# Altium PCB FIT_PM_Dual_Range_AFE.PcbDoc (part 17 of 17)
Units mm, origin at the board's own origin, x right, y up, seen from the top; angles counter-clockwise.
Board outline 259 x 114 mm, 8 copper layers (Top Layer, Mid-Layer 1, Mid-Layer 2, Layer 1, Layer 2, Mid-Layer 3, Mid-Layer 4, Bottom Layer), stack 1.616 mm thick; 963 components, 806 nets, 4757 pads, 2208 vias.
Unrouted connection lines stored in the file: 682.
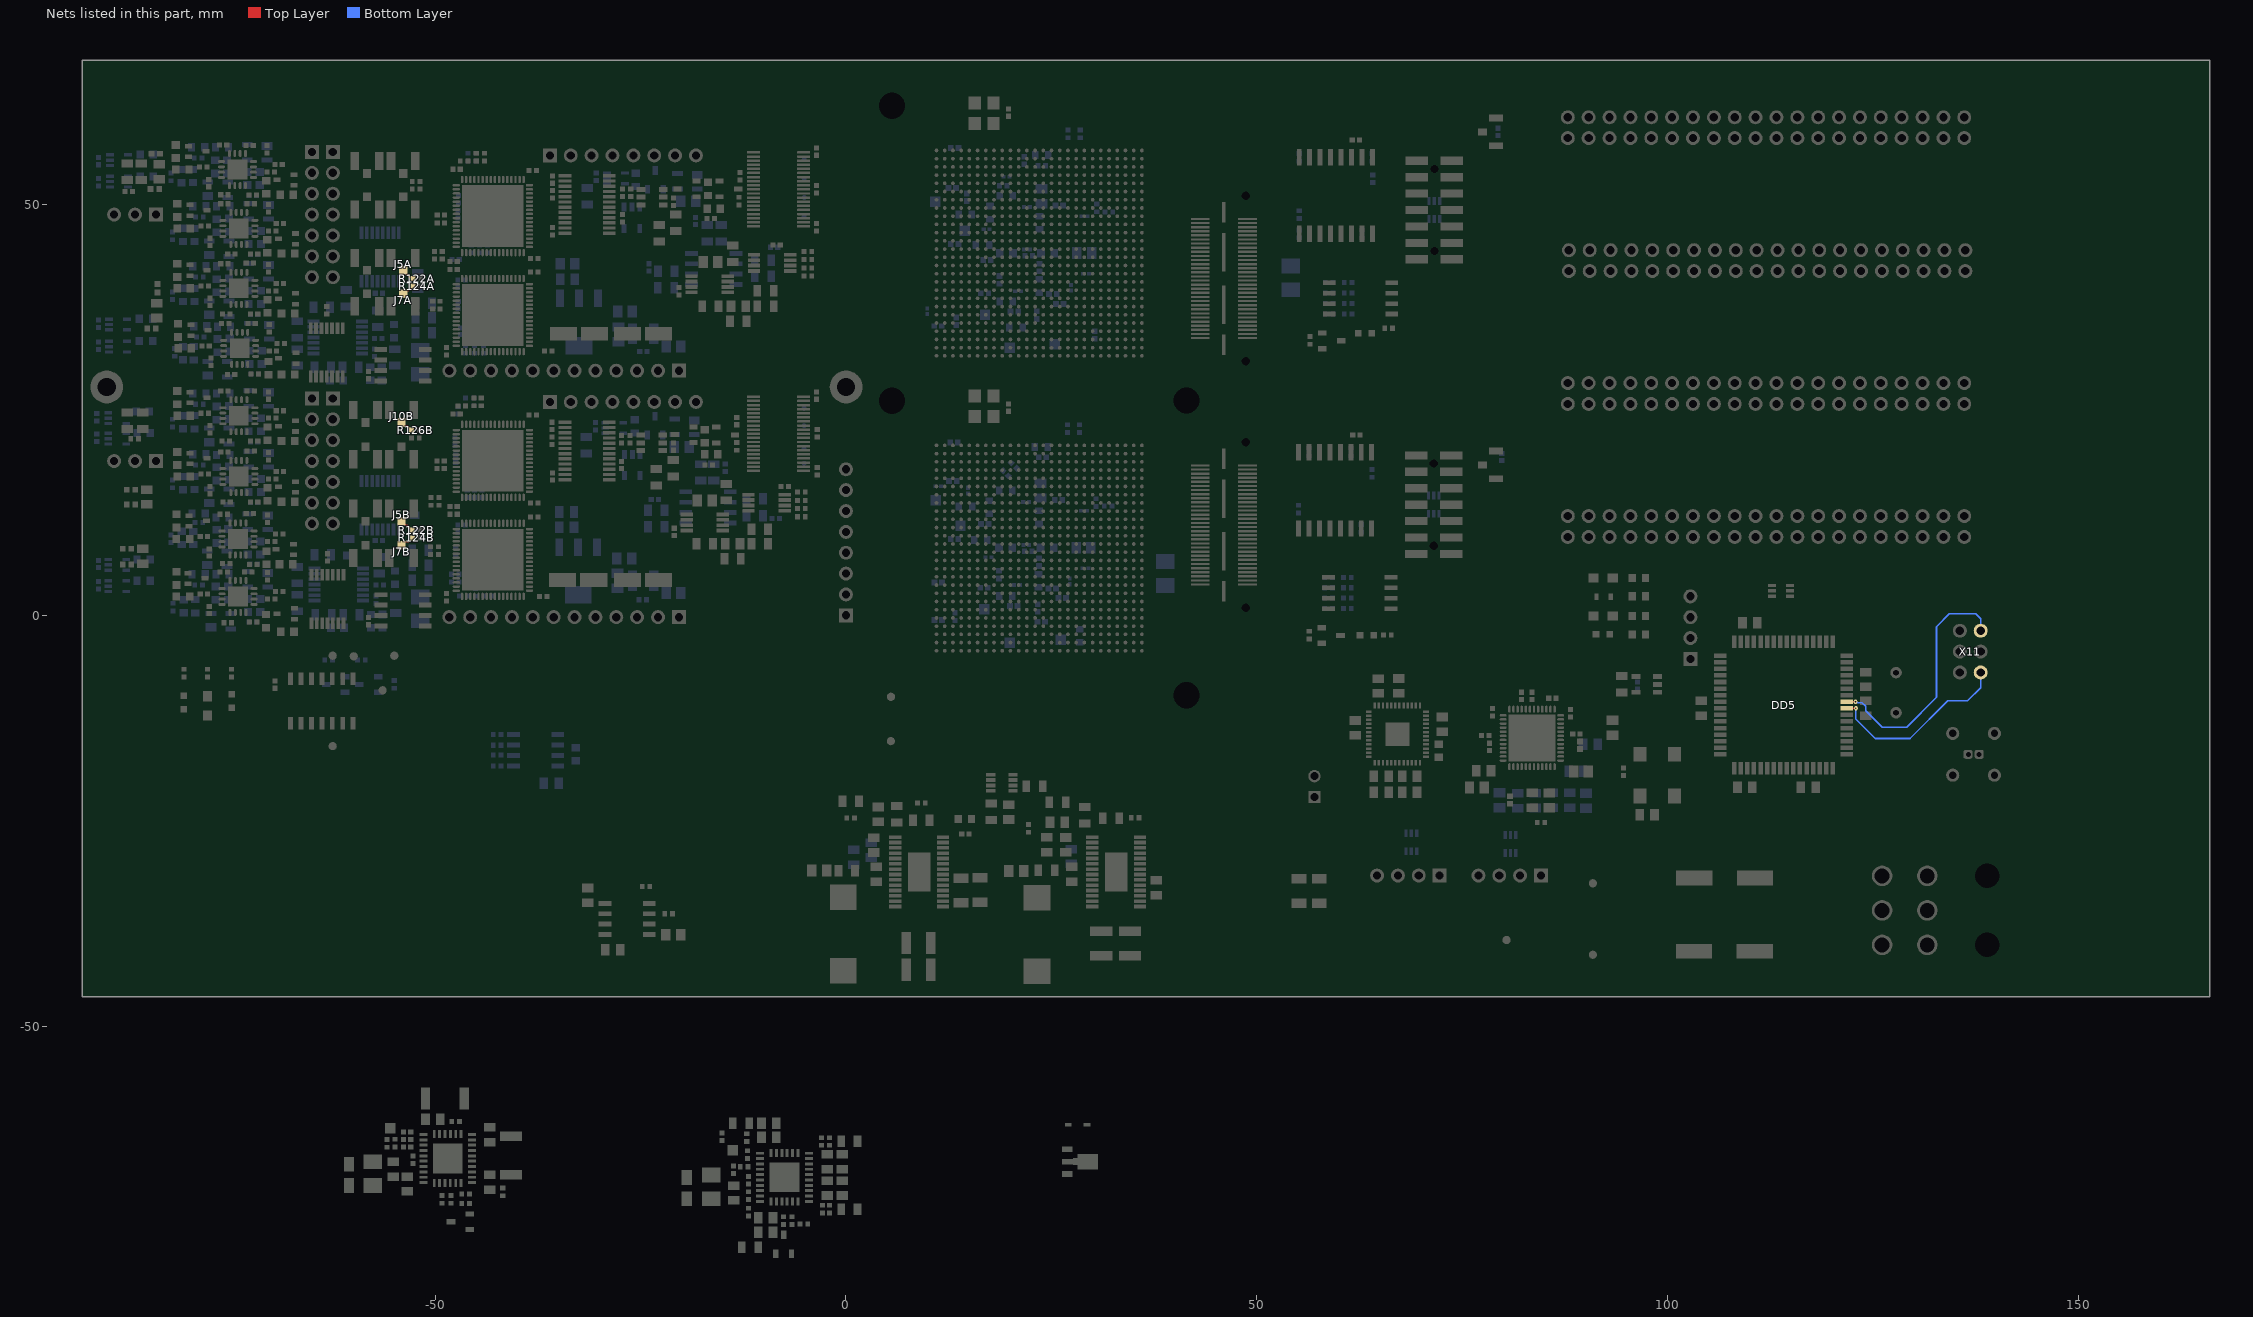
[diagram p19: the nets of this part, all layers, seen from the top]

## Via types
v1: diameter 0.5, hole 0.2, Top Layer to Bottom Layer, tented both sides, 1234 vias
v2: diameter 0.4, hole 0.2, Top Layer to Bottom Layer, tented both sides, 876 vias
v3: diameter 1, hole 0.6, Top Layer to Bottom Layer, tented both sides, 74 vias
v4: diameter 0.8, hole 0.4, Top Layer to Bottom Layer, tented both sides, 15 vias
v5: diameter 0.5, hole 0.2, Top Layer to Bottom Layer, 9 vias

## Nets (pads, with @x,y where several pads share a name; then routed paths per layer and width w, separated by ;. In a path a pad name is that pad's centre, name@x,y a point inside that pad or via, vN(x,y) a via of type N, cw(c..) or ccw(c..) an arc to the next point about the centre after c; other vN are vias at no path point) (continued)
XINBAB_P: J10B.1 R126B.1 | length 1.6
  Top Layer w0.145: J10B.1@-54.1,23.475 -53.735,23.11 -53.467,23.11 -53.126,22.769 -53.106,22.769 -52.889,22.551 R126B.1@-52.889,22.531
XINBBA_N: J7A.1 R124A.1 | length 1.6
  Top Layer w0.145: J7A.1@-53.9,39.146 -53.555,39.491 -53.267,39.491 -52.932,39.826 -52.912,39.826 -52.695,40.043 R124A.1@-52.695,40.063
XINBBA_P: J5A.1 R122A.1 | length 1.6
  Top Layer w0.1: J5A.1@-53.9,41.989 -53.9,41.964 -53.45,41.514 -53.425,41.514 -53.081,41.17 -52.87,41.17 R122A.1@-52.7,41
XINBBB_N: J7B.1 R124B.1 | length 1.7
  Top Layer w0.145: J7B.1@-54.1,8.525 -54.1,8.55 -53.673,8.977 -53.224,8.977 -53.016,9.186 -52.996,9.186 -52.778,9.403 R124B.1@-52.778,9.423
XINBBB_P: J5B.1 R122B.1 | length 1.8
  Top Layer w0.145: J5B.1@-54.1,11.475 -54.1,11.45 -53.673,11.023 -53.446,11.023 -53.021,10.597 -53.001,10.597 -52.784,10.38 R122B.1@-52.784,10.36
Xmega_PDI_CLOCK: DD5.57 X11.5 | length 30.4
  Top Layer w0.2: DD5.57@121.819,-10.514 v1(122.881,-10.514)
  Bottom Layer w0.2: v1(122.881,-10.514) 122.962,-10.514 123.082,-10.635 123.68,-10.635 124.119,-11.074 124.119,-11.614 126.119,-13.614 129.111,-13.614 132.747,-9.978 132.747,-1.374 134.307,0.186 137.534,0.186 138.119,-0.399 X11.5@138.119,-1.874
Xmega_PDI_DATA: DD5.56 X11.1 | length 23
  Top Layer w0.2: DD5.56@121.819,-11.314 v1(122.919,-11.314)
  Bottom Layer w0.2: v1(122.919,-11.314) 122.919,-12.614 125.298,-14.993 129.516,-14.993 134.095,-10.414 136.519,-10.414 138.119,-8.814 X11.1@138.119,-6.954
pads on no net: D1A.6 D1B.6 D2.2 D3.2 D4A.4 D4A.5 D4A.6 D4B.4 D4B.5 D4B.6 D5.4 D5.5 D5.6 DA2A.1 DA2A.2 DA2B.1 DA2B.2 DA6A.3 DA6A.11 DA6B.3 DA6B.11 DA6C.3 DA6C.11 DA6D.3 DA6D.11 DA15A.3 DA15A.11 DA15B.3 DA15B.11 DA15C.3 DA15C.11 DA15D.3 DA15D.11 DA17A.1 DA17A.5 DA17A.7 DA17A.8 DA17B.1 DA17B.5 DA17B.7 DA17B.8 DA27.5 DD3.6 DD3.7 DD3.12 DD3.13 DD3.19 DD3.20 DD3.31 DD3.33 DD3.45 DD3.46 DD5.6 DD5.7 DD5.8 DD5.9 DD5.10 DD5.11 DD5.12 DD5.13 DD5.17 DD5.18 DD5.20 DD5.26 DD5.27 DD5.28 DD5.29 DD5.30 DD5.31 DD5.32 DD5.33 DD5.36 DD5.37 DD5.40 DD5.41 DD5.42 DD5.43 DD5.46 DD5.47 DD5.48 DD5.49 DD5.55 DD10.7 DD19.1 DD19.5 DD19.6 DD19.19 DD19.20 DD19.21 DD19.22 DD19.25 DD19.26 DD19.27 DD19.28 DD19.31 DD19.32 DD19.33 DD19.34 DD19.35 DD19.36 DD19.39 DD19.40 DD19.41 DD19.42 DD19.45 DD19.46 DD19.47 DD19.48 DD21A.19 DD21B.19 DD31.1 HS1A.1 HS1B.1 IC4.11 IC4.12 IC5A.4 IC5B.4 IC6A.38 IC6A.39 IC6A.58 IC6A.59 IC6B.38 IC6B.39 IC6B.58 IC6B.59 IC7A.38 IC7A.39 IC7A.58 IC7A.59 IC7B.38 IC7B.39 IC7B.58 IC7B.59 IC8A.A3 IC8A.A4 IC8A.A14 IC8A.A15 IC8A.A17 IC8A.A18 IC8A.A19 IC8A.A20 IC8A.A22 IC8A.A23 IC8A.A24 IC8A.A25 IC8A.AA4 IC8A.AA5 IC8A.AA13 IC8A.AA18 IC8A.AA23 IC8A.AB17 IC8A.AB25 IC8A.AB26 IC8A.AC4 IC8A.AC5 IC8A.AC16 IC8A.AC26 IC8A.AD6 IC8A.AD7 IC8A.AD19 IC8A.AD26 IC8A.AE8 IC8A.AE9 IC8A.AE18 IC8A.AE25 IC8A.AE26 IC8A.AF6 IC8A.AF7 IC8A.B1 IC8A.B2 IC8A.B6 IC8A.B7 IC8A.B12 IC8A.B14 IC8A.B15 IC8A.B16 IC8A.B17 IC8A.B19 IC8A.B20 IC8A.B21 IC8A.B22 IC8A.B24 IC8A.B25 IC8A.B26 IC8A.C3 IC8A.C4 IC8A.C12 IC8A.C16 IC8A.C17 IC8A.C18 IC8A.C19 IC8A.C20 IC8A.C21 IC8A.C22 IC8A.C23 IC8A.C24 IC8A.C26 IC8A.D1 IC8A.D2 IC8A.D6 IC8A.D7 IC8A.D15 IC8A.D16 IC8A.D17 IC8A.D18 IC8A.D19 IC8A.D20 IC8A.D21 IC8A.D23 IC8A.D24 IC8A.D25 IC8A.D26 IC8A.E4 IC8A.E5 IC8A.E12 IC8A.E13 IC8A.E15 IC8A.E16 IC8A.E17 IC8A.E18 IC8A.E20 IC8A.E21 IC8A.E22 IC8A.E23 IC8A.E25 IC8A.F6 IC8A.F7 IC8A.F13 IC8A.F15 IC8A.F17 IC8A.F18 IC8A.F19 IC8A.F20 IC8A.F22 IC8A.F23 IC8A.G4 IC8A.G5 IC8A.G15 IC8A.G16 IC8A.G17 IC8A.G18 IC8A.G19 IC8A.G20 IC8A.G21 IC8A.G22 IC8A.H6 IC8A.H7 IC8A.H11 IC8A.H12 IC8A.H13 IC8A.H16 IC8A.H17 IC8A.H18 IC8A.H19 IC8A.J4 IC8A.J5 IC8A.J10 IC8A.J11 IC8A.J12 IC8A.J13 IC8A.J16 IC8A.J19 IC8A.J20 IC8A.K6 IC8A.K7 IC8A.K10 IC8A.K18 IC8A.L4 IC8A.L5 IC8A.L18 IC8A.M6 IC8A.M7 IC8A.M20 IC8A.M21 IC8A.M22 IC8A.M24 IC8A.N4 IC8A.N5 IC8A.N19 IC8A.N21 IC8A.N22 IC8A.N23 IC8A.N24 IC8A.N26 IC8A.P19 IC8A.P20 IC8A.P21 IC8A.P23 IC8A.P24 IC8A.R4 IC8A.R5 IC8A.R20 IC8A.R21 IC8A.R22 IC8A.R23 IC8A.R25 IC8A.T6 IC8A.T7 IC8A.T19 IC8A.T20 IC8A.T22 IC8A.T23 IC8A.T24 IC8A.T25 IC8A.U4 IC8A.U5 IC8A.U19 IC8A.U20 IC8A.U21 IC8A.U22 IC8A.U24 IC8A.V19 IC8A.V21 IC8A.V22 IC8A.V23 IC8A.V24 IC8A.W4 IC8A.W5 IC8A.W12 IC8A.W13 IC8A.W14 IC8A.W15 IC8A.W19 IC8A.W20 IC8A.W21 IC8A.W23 IC8A.W24 IC8A.Y6 IC8A.Y7 IC8A.Y13 IC8A.Y16 IC8A.Y17 IC8A.Y18 IC8A.Y22 IC8A.Y23 IC8B.A3 IC8B.A4 IC8B.A14 IC8B.A15 IC8B.A17 IC8B.A18 IC8B.A19 IC8B.A20 IC8B.A22 IC8B.A23 IC8B.A24 IC8B.A25 IC8B.AA4 IC8B.AA5 IC8B.AA13 IC8B.AA18 IC8B.AA23 IC8B.AB17 IC8B.AB25 IC8B.AB26 IC8B.AC4 IC8B.AC5 IC8B.AC16 IC8B.AC26 IC8B.AD6 IC8B.AD7 IC8B.AD19 IC8B.AD26 IC8B.AE8 IC8B.AE9 IC8B.AE18 IC8B.AE25 IC8B.AE26 IC8B.AF6 IC8B.AF7 IC8B.B1 IC8B.B2 IC8B.B6 IC8B.B7 IC8B.B12 IC8B.B14 IC8B.B15 IC8B.B16 IC8B.B17 IC8B.B19 IC8B.B20 IC8B.B21 IC8B.B22 IC8B.B24 IC8B.B25 IC8B.B26 IC8B.C3 IC8B.C4 IC8B.C12 IC8B.C16 IC8B.C17 IC8B.C18 IC8B.C19 IC8B.C20 IC8B.C21 IC8B.C22 IC8B.C23 IC8B.C24 IC8B.C26 IC8B.D1 IC8B.D2 IC8B.D6 IC8B.D7 IC8B.D15 IC8B.D16 IC8B.D17 IC8B.D18 IC8B.D19 IC8B.D20 IC8B.D21 IC8B.D23 IC8B.D24 IC8B.D25 IC8B.D26 IC8B.E4 IC8B.E5 IC8B.E12 IC8B.E13 IC8B.E15 IC8B.E16 IC8B.E17 IC8B.E18 IC8B.E20 IC8B.E21 IC8B.E22 IC8B.E23 IC8B.E25 IC8B.F6 IC8B.F7 IC8B.F13 IC8B.F15 IC8B.F17 IC8B.F18 IC8B.F19 IC8B.F20 IC8B.F22 IC8B.F23 IC8B.G4 IC8B.G5 IC8B.G15 IC8B.G16 IC8B.G17 IC8B.G18 IC8B.G19 IC8B.G20 IC8B.G21 IC8B.G22 IC8B.H6 IC8B.H7 IC8B.H11 IC8B.H12 IC8B.H13 IC8B.H16 IC8B.H17 IC8B.H18 IC8B.H19 IC8B.J4 IC8B.J5 IC8B.J10 IC8B.J11 IC8B.J12 IC8B.J13 IC8B.J16 IC8B.J19 IC8B.J20 IC8B.K6 IC8B.K7 IC8B.K10 IC8B.K18 IC8B.L4 IC8B.L5 IC8B.L18 IC8B.M6 IC8B.M7 IC8B.M20 IC8B.M21 IC8B.M22 IC8B.M24 IC8B.N4 IC8B.N5 IC8B.N19 IC8B.N21 IC8B.N22 IC8B.N23 IC8B.N24 IC8B.N26 IC8B.P19 IC8B.P20 IC8B.P21 IC8B.P23 IC8B.P24 IC8B.R4 IC8B.R5 IC8B.R20 IC8B.R21 IC8B.R22 IC8B.R23 IC8B.R25 IC8B.T6 IC8B.T7 IC8B.T19 IC8B.T20 IC8B.T22 IC8B.T23 IC8B.T24 IC8B.T25 IC8B.U4 IC8B.U5 IC8B.U19 IC8B.U20 IC8B.U21 IC8B.U22 IC8B.U24 IC8B.V19 IC8B.V21 IC8B.V22 IC8B.V23 IC8B.V24 IC8B.W4 IC8B.W5 IC8B.W12 IC8B.W13 IC8B.W14 IC8B.W15 IC8B.W19 IC8B.W20 IC8B.W21 IC8B.W23 IC8B.W24 IC8B.Y6 IC8B.Y7 IC8B.Y13 IC8B.Y16 IC8B.Y17 IC8B.Y18 IC8B.Y22 IC8B.Y23 IC15A.4 IC15A.5 IC15A.6 IC15A.11 IC15A.12 IC15A.13 IC15A.14 IC15B.4 IC15B.5 IC15B.6 IC15B.11 IC15B.12 IC15B.13 IC15B.14 J1A.12 J1A.15 J1A.16 J1B.12 J1B.15 J1B.16 J8A.49 J8A.50 J8A.51 J8A.52 J8A.53 J8A.54 J8A.55 J8A.56 J8A.57 J8A.58 J8A.59 J8A.60 J8A.65 J8A.66 J8B.49 J8B.50 J8B.51 J8B.52 J8B.53 J8B.54 J8B.55 J8B.56 J8B.57 J8B.58 J8B.59 J8B.60 J8B.65 J8B.66 U1A.12 U1A.13 U1A.16 U1A.17 U1B.12 U1B.13 U1B.16 U1B.17 VD5A.2 VD5B.2 X5.1 X5.5 X5.39 X6.1 X6.5 X6.39 X9.1 X9.5 X9.39 X10.1 X10.5 X10.39 X11.3 X11.4 X15.MECH1 X15.MECH2 ZQ2.1
copper on no net: | length 13.9
  Top Layer w0.1: v1(24.5,38.1) 25.533,38.1 26.019,38.586
  Top Layer w0.145: 21.019,14.686 v2(21.333,14.371)
  Top Layer w0.2: 59.019,-27.844 v1(59.019,-27.167)
  Top Layer w0.3: -69.4,39.5 v1(-68.8,39.5) ; -68.45,40.4 v1(-67.8,40.4) ; v1(-67.8,22.429) -67.05,22.429 -67,22.379 -67,21.329 -67.1,21.229
  Mid-Layer 2 w0.1: -15.701,25.999 -15.694,25.992
  Bottom Layer w0.2: -14.446,-28.741 -10.251,-28.741 v3(-7.741,-26.231)
  other v1: -49.904,-41.991 -69.591,-37.791 -61.891,-35.191 -52.504,-34.091 -9.641,-31.441 -18.594,-30.688 -57.597,-20.624 -56.597,-20.624 -55.697,-20.624 -67.8,15.029 -82.2,26.968 -67.968,52.396
  other v3: -90.231,-17.814 -89.081,-17.814 -87.931,-17.814 -90.281,-16.414 -89.131,-16.414 -87.981,-16.414

## Polygon pours and split planes (outlines as drawn)
P1V8_QDCB on Layer 2 "NONET_L-01_P-001" (solid, remove dead copper, pour order 9098): -20.7,3.6 -22.7,1.6 -25.5,1.6 -26,1.1 -49.3,1.1 -49.8,1.6 -49.8,26.2 -49.4,26.6 -46.6,26.6 -45.4,25.4 -45.4,4.6 -44.8,4 -26.4,4 -24.1,6.3 -20.8,6.3 -20.7,6.2 -20.7,5.1
P1V8_QDCA on Layer 2 "NONET_L-01_P-001" (solid, remove dead copper, pour order 9097): -22.2,31.9 -23.3,30.8 -49.3,30.8 -49.7,31.2 -49.7,55.3 -49,56 -46.4,56 -45.7,55.3 -45.7,33.4 -45.3,33 -25.4,33 -24.3,34.1 -22.6,34.1 -22.2,33.7
P0V85 on Layer 2 "P0V85_L05_P9064" (solid, pour order 9064): 36.769,44.336 36.769,6.086 38.519,4.336 48.363,4.336 51.075,7.048 51.075,43.221 49.96,44.336 38.769,44.336
N5V5 on Layer 2 "N5V5_L05_P9053" (solid, pour order 9053): 20.703,-40.924 20.703,-22.224 39.303,-22.224 39.303,-40.924
P1V8 on Layer 2 "P1V8_L05_P9063" (solid, pour order 9063): 28.895,-11.176 34.134,-16.414 42.019,-16.414 50.019,-24.414 58.519,-24.414 59.519,-23.414 59.519,-2.914 54.35,2.255 28.832,2.255
VIN_P12V0 on Layer 2 "VIN_P12V0_L05_P9062" (solid, pour order 9062): 60.371,34.686 60.371,-44.514 113.519,-44.514 113.519,-27.414 85.019,-27.414 71.619,-14.014 71.619,34.686
P3V3_QDCA on Bottom Layer "NONET_L-01_P-001" (solid, remove dead copper, pour order 9096): -29.4,37.1 -28.9,37.6 -28.9,40.3 -29.4,40.8 -31.1,40.8 -31.6,40.3 -31.6,37.6 -31.1,37.1
P1V8_QDCA on Bottom Layer "NONET_L-01_P-001" (solid, remove dead copper, pour order 9093): -21.5,34.2 -23.8,34.2 -24.6,33.4 -24.6,31.8 -24.3,31.5 -21.5,31.5 -21.2,31.8 -21.2,33.9
NetC23_2 on Bottom Layer "NETC23_2_L08_P9086" (solid, remove dead copper, pour order 9086): -49.9,-71.5 -50.3,-71.9 -53.5,-71.9 -53.9,-71.5 -53.9,-70.6 -51.8,-68.5 -51.8,-58.2 -50.8,-57.2 -48.9,-57.2 -48.5,-57.6 -48.5,-59.5 -49.9,-60.9 -49.9,-68.1
P3V3_QDCB on Bottom Layer "P3V3_QDCB_L08_P9082" (solid, remove dead copper, pour order 9082): -31.6,9.2 -31.6,5 -31.3,4.7 -29.2,4.7 -28.9,5 -28.9,9.2 -29.2,9.5 -31.3,9.5
P1V8_QDCB on Bottom Layer "P1V8_QDCB_L08_P9079" (solid, remove dead copper, pour order 9079): -24.6,2.2 -24.6,5.8 -24.1,6.3 -21,6.3 -20.7,6 -20.7,4 -21.3,3.4 -21.3,2 -21.7,1.6 -24,1.6
P3V3_QDCA on Top Layer "NONET_L-01_P-001" (solid, remove dead copper, pour order 9095): -29,33.1 -28.8,33.3 -28.8,39.9 -29.4,40.5 -31.5,40.5 -32.3,39.7 -32.3,33.3 -32.1,33.1 -31.8,33.1
P1V8_QDCA on Top Layer "NONET_L-01_P-001" (solid, remove dead copper, pour order 9094): -21,35.1 -21.2,35.3 -24.4,35.3 -24.6,35.1 -24.6,31.8 -24.3,31.5 -21.5,31.5 -21,32
P12V0_IN on Top Layer "P12V0_IN_L01_P9092" (solid, remove dead copper, pour order 9092): -50.9,-67.3 -50.8,-67.2 -50.8,-66.3 -50.9,-66.2 -52,-66.2 -52.2,-66.4 -53.3,-66.4 -53.8,-65.9 -54.8,-65.9 -55.5,-65.2 -55.5,-64.5 -55.6,-64.4 -62.5,-64.4 -62.8,-64.7 -62.8,-67.5 -62.5,-67.8 -56.5,-67.8 -55.8,-67.1 -52.3,-67.1 -52.1,-67.3
P12V0_IN on Top Layer "P12V0_IN_L01_P9091" (solid, remove dead copper, pour order 9091): -9.9,-69.6 -9.8,-69.5 -9.8,-68.6 -10,-68.4 -10.8,-68.4 -11.2,-68.8 -12.8,-68.8 -13.2,-68.4 -13.2,-67.8 -13.4,-67.6 -14.7,-67.6 -15.5,-66.8 -15.5,-66.1 -16.1,-65.5 -21.1,-65.5 -21.6,-66 -21.6,-68.9 -21.1,-69.4 -15.1,-69.4 -14.5,-70 -12.8,-70 -12.4,-69.6
NetC68_2 on Top Layer "NETC68_2_L01_P9090" (solid, remove dead copper, pour order 9090): -5,-67 -5.1,-66.9 -5.1,-66 -5,-65.9 -3.7,-65.9 -3.3,-65.5 -3.3,-65.2 -3.1,-65 -1.4,-65 -1.3,-64.9 -1.3,-63.2 -1.2,-63.1 0.3,-63.1 0.5,-63.3 0.5,-66.3 0.3,-66.5 -3,-66.5 -3.5,-67
NetC70_2 on Top Layer "NETC70_2_L01_P9089" (solid, remove dead copper, pour order 9089): -5,-69.8 -5.1,-69.9 -5.1,-70.9 -5,-71 -3.3,-71 -3,-71.3 -1.4,-71.3 -1.3,-71.4 -1.3,-73 -1.1,-73.2 0.2,-73.2 0.5,-72.9 0.5,-70 0.3,-69.8
NetC72_2 on Top Layer "NETC72_2_L01_P9088" (solid, remove dead copper, pour order 9088): -8.9,-70.8 -9,-70.7 -9.5,-70.7 -9.9,-71.1 -11.2,-71.1 -11.3,-71.2 -11.3,-77.7 -11.1,-77.9 -10.2,-77.9 -10,-77.7 -10,-72.2 -9.7,-71.9 -9,-71.9 -8.9,-71.8
NetC75_2 on Top Layer "NETC75_2_L01_P9087" (solid, remove dead copper, pour order 9087): -8.9,-66 -9,-66.1 -9.3,-66.1 -9.7,-65.7 -11.1,-65.7 -11.2,-65.6 -11.2,-63 -11.5,-62.7 -12.4,-62.7 -12.6,-62.5 -12.6,-60.8 -12.1,-60.3 -10,-60.3 -9.6,-60.7 -9.6,-64.2 -8.9,-64.9
NetC23_2 on Top Layer "NETC23_2_L01_P9085" (solid, remove dead copper, pour order 9085): -49.9,-63.6 -50,-63.7 -50.5,-63.7 -50.8,-63.4 -52.1,-63.4 -52.3,-63.2 -53.3,-63.2 -53.4,-63.1 -53.4,-57.5 -53.1,-57.2 -48.9,-57.2 -48.5,-57.6 -48.5,-59.6 -48.9,-60 -49.9,-60 -50.2,-60.3 -50.2,-62.3 -49.9,-62.6
NetC23_2 on Top Layer "NETC23_2_L01_P9084" (solid, remove dead copper, pour order 9084): -49.9,-68.5 -50,-68.4 -50.5,-68.4 -50.9,-68.8 -52,-68.8 -52.5,-69.3 -54.1,-69.3 -54.4,-69.6 -54.4,-71.7 -54.2,-71.9 -50.1,-71.9 -49.9,-71.7
NetC21_2 on Top Layer "NETC21_2_L01_P9083" (solid, remove dead copper, pour order 9083): -45.9,-67.4 -46.1,-67.6 -46.1,-68.5 -45.9,-68.7 -42.4,-68.7 -42,-69.1 -39.1,-69.1 -38.9,-68.9 -38.9,-66.9 -39.4,-66.4 -42,-66.4 -42.4,-66 -42.4,-63.6 -42.6,-63.4 -44.1,-63.4 -44.3,-63.6 -46,-63.6 -46.1,-63.7 -46.1,-64.6 -46,-64.7 -44.2,-64.7 -44.1,-64.8 -44.1,-67.3 -44.2,-67.4
P3V3_QDCB on Top Layer "P3V3_QDCB_L01_P9081" (solid, remove dead copper, pour order 9081): -28.9,8.7 -29.6,9.4 -32.2,9.4 -32.5,9.1 -32.5,3.2 -32.2,2.9 -29.2,2.9 -28.9,3.2
P1V8_QDCB on Top Layer "P1V8_QDCB_L01_P9080" (solid, remove dead copper, pour order 9080): -24.7,5.8 -24.2,6.3 -20.9,6.3 -20.5,5.9 -20.5,3.4 -20.8,3.1 -24.4,3.1 -24.7,3.4

## Other copper
Bottom Layer:
  rectangle: 60.619,30.843 66.892,33.634

## Silkscreen, mask and mechanical layers (free items; w line width, h text height)
Top Overlay:
  drawing of 6 lines, arcs and shapes, not listed
  text "FPGA A" at 28.901,60.381 h1
  text "IO1" at -15.27,57.545 h0.6 r90
  text "FPGA_RESET" at 76.583,55.961 h0.6 r90
  text "PUDC" at 68.522,39.988 h0.6
  text "M2" at 68.522,38.738 h0.6
  text "M1" at 68.522,37.488 h0.6
  text "M0" at 68.522,36.238 h0.6
  text "FPGA DONE" at 60.349,32.072 h0.6
  text "IO2" at -27.29,31.559 h0.6 r90
  text "IO1" at -24.67,31.559 h0.6 r90
  text "FPGA B" at 28.901,24.481 h1
  text "IO1" at -15.288,23.159 h0.6 r90
  text "N5V5" at 2.701,16.781 h2
  text "FPGA_RESET" at 76.63,15.132 h0.6 r90
  text "N5V5" at 2.701,14.359 h2
  text "N5V5" at 2.701,11.938 h2
  text "GND" at 2.699,9.488 h2
  text "GND" at 2.699,7.039 h2
  text "P5V5" at 2.701,4.604 h2
  text "PUDC" at 69.022,4.238 h0.6
  text "SYS FAIL" at 84.022,4.238 h0.6
  text "M2" at 69.022,2.988 h0.6
  text "P5V5" at 2.701,2.17 h2
  text "CLK IN" at 84.022,1.988 h0.6
  text "M1" at 69.022,1.738 h0.6
  text "GND" at 105.067,1.657 h0.6 r90
  text "M0" at 69.022,0.488 h0.6
  text "P5V5" at 2.701,-0.265 h2
  text "CLK ERR" at 84.022,-0.262 h0.6
  text "Tx" at 104.967,-0.962 h0.6 r90
  text "READY" at 84.022,-2.512 h0.6
  text "Rx" at 104.967,-3.162 h0.6 r90
  text "IO2" at -27.712,-3.445 h0.6 r90
  text "IO1" at -25.093,-3.445 h0.6 r90
  text "FPGA DONE" at 60.349,-3.744 h0.6
  text "EN_P5V5.." at -61.4,-4.129 h0.6
  text "EN_PSU" at -55.366,-4.129 h0.6
  text "ENABLE" at -65.545,-4.144 h0.6
  text "P3V3" at 105.02,-6.524 h0.6 r90
  text "P3V8" at -57.941,-8.29 h0.6
  text "P1V8" at 4.422,-9.012 h0.6
  text "PWRIN_OK" at -85.985,-10.577 h0.6 r90
  text "PSU_Fail" at -84.997,-10.577 h0.6 r90
  text "PLL_Lock" at -83.995,-10.577 h0.6 r90
  text "P3V3" at 4.422,-14.512 h0.6
  text "IN_PWR_OK" at -63.828,-17.162 h0.6
  text "EN_PSU" at 54.867,-22.262 h0.6 r90
  text "GND" at 128.707,-25.582 h0.6
  text "12V" at 126.554,-25.599 h0.6
  text "GND" at 128.707,-26.57 h0.6
  text "5V" at 126.554,-26.587 h0.6
  text "GND" at 128.707,-27.572 h0.6
  text "5V" at 126.554,-27.589 h0.6
  text "FPGA A" at 77.676,-29.339 h0.6
  text "FPGA B" at 65.369,-29.36 h0.6
  text "VIN_P12V0" at 88.772,-33.912 h0.6
  text "GND" at 64.667,-36.417 h0.6 r90
  text "IO1" at 67.323,-36.417 h0.6 r90
  text "IO2" at 69.979,-36.417 h0.6 r90
  text "P3V3" at 72.635,-36.417 h0.6 r90
  text "GND" at 76.467,-36.417 h0.6 r90
  text "IO1" at 79.123,-36.417 h0.6 r90
  text "IO2" at 81.779,-36.417 h0.6 r90
  text "P3V3" at 84.435,-36.417 h0.6 r90
  text "VIN_P5V0" at 88.772,-40.412 h0.6
  text "GND" at 79.772,-41.012 h0.6
  text "FIT PM Dual Range AFE v2.0" at 57.373,-45.119 h4.5
  text "WUT 2025" at 113.981,-45.145 h4.5
Bottom Overlay:
  lines w0.15: -92.9,-2.3 -66.2,-2.3 -13.5,-2.3 ; -92.9,27.7 -66.2,27.7 -13.5,27.7 ; -92.9,57.7 -66.2,57.7 -13.5,57.7
Top 3D Body:
  lines w0.05: -92.981,-46.414 -92.981,67.586 166.019,67.586 166.019,-46.414 -92.981,-46.414
  lines w0.381: 149.354,-130.606 159.766,-130.606 183.381,-130.606 205.219,-130.606 221.725,-130.606 236.199,-130.606 ; 149.354,-127.558 159.766,-127.558 183.381,-127.558 205.219,-127.558 221.725,-127.558 236.199,-127.558 ; 149.354,-124.51 159.766,-124.51 183.381,-124.51 205.219,-124.51 221.725,-124.51 236.199,-124.51 ; 149.354,-121.462 159.766,-121.462 183.381,-121.462 205.219,-121.462 221.725,-121.462 236.199,-121.462 ; 149.354,-118.414 159.766,-118.414 183.381,-118.414 205.219,-118.414 221.725,-118.414 236.199,-118.414 ; 149.354,-115.366 159.766,-115.366 183.381,-115.366 205.219,-115.366 221.725,-115.366 236.199,-115.366 ; 149.354,-112.318 159.766,-112.318 183.381,-112.318 205.219,-112.318 221.725,-112.318 236.199,-112.318 ; 149.354,-109.27 159.766,-109.27 183.381,-109.27 205.219,-109.27 221.725,-109.27 236.199,-109.27 ; 149.354,-106.222 159.766,-106.222 183.381,-106.222 205.219,-106.222 221.725,-106.222 236.199,-106.222 ; 149.354,-103.174 159.766,-103.174 183.381,-103.174 205.219,-103.174 221.725,-103.174 236.199,-103.174 ; 149.354,-100.126 159.766,-100.126 183.381,-100.126 205.219,-100.126 221.725,-100.126 236.199,-100.126 ; 149.354,-97.078 159.766,-97.078 183.381,-97.078 205.219,-97.078 221.725,-97.078 236.199,-97.078 ; 149.354,-94.03 159.766,-94.03 183.381,-94.03 205.219,-94.03 221.725,-94.03 236.199,-94.03 ; 149.354,-90.982 159.766,-90.982 183.381,-90.982 205.219,-90.982 221.725,-90.982 236.199,-90.982 ; 149.354,-87.934 159.766,-87.934 183.381,-87.934 205.219,-87.934 221.725,-87.934 236.199,-87.934 ; 149.354,-84.886 159.766,-84.886 183.381,-84.886 205.219,-84.886 221.725,-84.886 236.199,-84.886 ; 149.354,-81.838 159.766,-81.838 183.381,-81.838 205.219,-81.838 221.725,-81.838 236.199,-81.838 ; 149.354,-78.79 159.766,-78.79 183.381,-78.79 205.219,-78.79 221.725,-78.79 236.199,-78.79 ; 149.354,-75.742 236.199,-75.742 ; 159.766,-72.694 159.766,-133.654 ; 183.381,-72.694 183.381,-133.654 ; 205.219,-72.694 205.219,-133.654 ; 221.725,-72.694 221.725,-133.654 ; 159.766,-133.654 183.381,-133.654 ; 159.766,-133.654 149.354,-133.654 149.354,-72.694 236.199,-72.694 236.199,-133.654 221.725,-133.654 ; 183.381,-133.654 205.219,-133.654 ; 205.219,-133.654 221.725,-133.654
  text "Layer" at 151.132,-74.98 h1.52
  text "Name" at 161.544,-74.98 h1.52
  text "Material" at 185.159,-74.98 h1.52
  text "Thickness" at 206.997,-74.98 h1.52
  text "Constant" at 223.503,-74.98 h1.52
  text "Top Overlay" at 161.544,-78.028 h1.52
  text "Top Solder" at 161.544,-81.076 h1.52
  text "Solder Resist" at 185.159,-81.076 h1.52
  text "0,010mm" at 206.997,-81.076 h1.52
  text "3.5" at 223.503,-81.076 h1.52
  text "1" at 151.132,-84.124 h1.52
  text "Top Layer" at 161.544,-84.124 h1.52
  text "0,036mm" at 206.997,-84.124 h1.52
  text "Dielectric 1" at 161.544,-87.172 h1.52
  text "FR-4" at 185.159,-87.172 h1.52
  text "0,240mm" at 206.997,-87.172 h1.52
  text "4.5" at 223.503,-87.172 h1.52
  text "2" at 151.132,-90.22 h1.52
  text "Mid-Layer 1" at 161.544,-90.22 h1.52
  text "0,018mm" at 206.997,-90.22 h1.52
  text "Dielectric 2" at 161.544,-93.268 h1.52
  text "FR-4" at 185.159,-93.268 h1.52
  text "0,160mm" at 206.997,-93.268 h1.52
  text "4.5" at 223.503,-93.268 h1.52
  text "3" at 151.132,-96.316 h1.52
  text "Mid-Layer 2" at 161.544,-96.316 h1.52
  text "0,018mm" at 206.997,-96.316 h1.52
  text "Dielectric 6" at 161.544,-99.364 h1.52
  text "PP-006" at 185.159,-99.364 h1.52
  text "0,240mm" at 206.997,-99.364 h1.52
  text "4.1" at 223.503,-99.364 h1.52
  text "4" at 151.132,-102.412 h1.52
  text "Layer 1" at 161.544,-102.412 h1.52
  text "CF-004" at 185.159,-102.412 h1.52
  text "0,018mm" at 206.997,-102.412 h1.52
  text "Dielectric 3" at 161.544,-105.46 h1.52
  text "FR-4" at 185.159,-105.46 h1.52
  text "0,160mm" at 206.997,-105.46 h1.52
  text "4.5" at 223.503,-105.46 h1.52
  text "5" at 151.132,-108.508 h1.52
  text "Layer 2" at 161.544,-108.508 h1.52
  text "CF-004" at 185.159,-108.508 h1.52
  text "0,018mm" at 206.997,-108.508 h1.52
  text "Dielectric 7" at 161.544,-111.556 h1.52
  text "PP-006" at 185.159,-111.556 h1.52
  text "0,240mm" at 206.997,-111.556 h1.52
  text "4.1" at 223.503,-111.556 h1.52
  text "6" at 151.132,-114.604 h1.52
  text "Mid-Layer 3" at 161.544,-114.604 h1.52
  text "0,018mm" at 206.997,-114.604 h1.52
  text "Dielectric 4" at 161.544,-117.652 h1.52
  text "FR-4" at 185.159,-117.652 h1.52
  text "0,160mm" at 206.997,-117.652 h1.52
  text "4.5" at 223.503,-117.652 h1.52
  text "7" at 151.132,-120.7 h1.52
  text "Mid-Layer 4" at 161.544,-120.7 h1.52
  text "0,018mm" at 206.997,-120.7 h1.52
  text "Dielectric 5" at 161.544,-123.748 h1.52
  text "FR-4" at 185.159,-123.748 h1.52
  text "0,240mm" at 206.997,-123.748 h1.52
  text "4.5" at 223.503,-123.748 h1.52
  text "8" at 151.132,-126.796 h1.52
  text "Bottom Layer" at 161.544,-126.796 h1.52
  text "0,036mm" at 206.997,-126.796 h1.52
  text "Bottom Solder" at 161.544,-129.844 h1.52
  text "Solder Resist" at 185.159,-129.844 h1.52
  text "0,010mm" at 206.997,-129.844 h1.52
  text "3.5" at 223.503,-129.844 h1.52
  text "Bottom Overlay" at 161.544,-132.892 h1.52
Mechanical 8:
  lines w0.15: -82.7,-2.7 -82.7,27.3 ; -66.2,-2.7 -66.2,27.3

## Text inside footprints (layer, text, board x,y; h text height)
IC3: Drill Drawing "soldermask defined pads,  / do not increase/decrease  / soldermask aperture in this area" at -37.837,-79.739 h1.2 r90
IC4: Drill Drawing "soldermask defined pads,  / do not increase/decrease  / soldermask aperture in this area" at 3.159,-82.027 h1.2 r90
IC8A: Mechanical 14 "AF" at 38.419,56.886 h0.6 r180; Mechanical 14 "AE" at 38.419,55.886 h0.6 r180; Mechanical 14 "AD" at 38.419,54.886 h0.6 r180; Mechanical 14 "AC" at 38.419,53.886 h0.6 r180; Mechanical 14 "A" at 37.919,31.886 h0.6 r180; Mechanical 14 "B" at 37.919,32.886 h0.6 r180; Mechanical 14 "C" at 37.919,33.886 h0.6 r180; Mechanical 14 "D" at 37.919,34.886 h0.6 r180; Mechanical 14 "E" at 37.919,35.886 h0.6 r180; Mechanical 14 "F" at 37.919,36.886 h0.6 r180; Mechanical 14 "G" at 37.919,37.886 h0.6 r180; Mechanical 14 "H" at 37.919,38.886 h0.6 r180; Mechanical 14 "J" at 37.919,39.886 h0.6 r180; Mechanical 14 "K" at 37.919,40.886 h0.6 r180; Mechanical 14 "L" at 37.919,41.886 h0.6 r180; Mechanical 14 "M" at 37.919,42.886 h0.6 r180; Mechanical 14 "N" at 37.919,43.886 h0.6 r180; Mechanical 14 "P" at 37.919,44.886 h0.6 r180; Mechanical 14 "R" at 37.919,45.886 h0.6 r180; Mechanical 14 "T" at 37.919,46.886 h0.6 r180; Mechanical 14 "U" at 37.919,47.886 h0.6 r180; Mechanical 14 "V" at 37.919,48.886 h0.6 r180; Mechanical 14 "W" at 37.919,49.886 h0.6 r180; Mechanical 14 "Y" at 37.919,50.886 h0.6 r180; Mechanical 14 "AA" at 38.419,51.886 h0.6 r180; Mechanical 14 "AB" at 38.419,52.886 h0.6 r180; Mechanical 14 "17" at 19.769,30.086 h0.6 r270; Mechanical 14 "22" at 14.819,30.086 h0.6 r270; Mechanical 14 "21" at 15.769,30.086 h0.6 r270; Mechanical 14 "20" at 16.769,30.086 h0.6 r270; Mechanical 14 "19" at 17.769,30.086 h0.6 r270; Mechanical 14 "18" at 18.769,30.086 h0.6 r270; Mechanical 14 "1" at 35.769,30.086 h0.6 r270; Mechanical 14 "6" at 30.769,30.086 h0.6 r270; Mechanical 14 "7" at 29.769,30.086 h0.6 r270; Mechanical 14 "8" at 28.769,30.086 h0.6 r270; Mechanical 14 "9" at 27.769,30.086 h0.6 r270; Mechanical 14 "10" at 26.769,30.086 h0.6 r270; Mechanical 14 "11" at 25.769,30.086 h0.6 r270; Mechanical 14 "12" at 24.769,30.086 h0.6 r270; Mechanical 14 "13" at 23.769,30.086 h0.6 r270; Mechanical 14 "14" at 22.769,30.086 h0.6 r270; Mechanical 14 "15" at 21.769,30.086 h0.6 r270; Mechanical 14 "16" at 20.769,30.086 h0.6 r270; Mechanical 14 "5" at 31.769,30.086 h0.6 r270; Mechanical 14 "4" at 32.769,30.086 h0.6 r270; Mechanical 14 "3" at 33.769,30.086 h0.6 r270; Mechanical 14 "2" at 34.769,30.086 h0.6 r270; Mechanical 14 "23" at 13.819,30.086 h0.6 r270; Mechanical 14 "24" at 12.819,30.086 h0.6 r270; Mechanical 14 "25" at 11.819,30.086 h0.6 r270; Mechanical 14 "26" at 10.819,30.086 h0.6 r270
IC8B: Mechanical 14 "26" at 10.819,-5.814 h0.6 r270; Mechanical 14 "25" at 11.819,-5.814 h0.6 r270; Mechanical 14 "24" at 12.819,-5.814 h0.6 r270; Mechanical 14 "23" at 13.819,-5.814 h0.6 r270; Mechanical 14 "2" at 34.769,-5.814 h0.6 r270; Mechanical 14 "3" at 33.769,-5.814 h0.6 r270; Mechanical 14 "4" at 32.769,-5.814 h0.6 r270; Mechanical 14 "5" at 31.769,-5.814 h0.6 r270; Mechanical 14 "16" at 20.769,-5.814 h0.6 r270; Mechanical 14 "15" at 21.769,-5.814 h0.6 r270; Mechanical 14 "14" at 22.769,-5.814 h0.6 r270; Mechanical 14 "13" at 23.769,-5.814 h0.6 r270; Mechanical 14 "12" at 24.769,-5.814 h0.6 r270; Mechanical 14 "11" at 25.769,-5.814 h0.6 r270; Mechanical 14 "10" at 26.769,-5.814 h0.6 r270; Mechanical 14 "9" at 27.769,-5.814 h0.6 r270; Mechanical 14 "8" at 28.769,-5.814 h0.6 r270; Mechanical 14 "7" at 29.769,-5.814 h0.6 r270; Mechanical 14 "6" at 30.769,-5.814 h0.6 r270; Mechanical 14 "1" at 35.769,-5.814 h0.6 r270; Mechanical 14 "18" at 18.769,-5.814 h0.6 r270; Mechanical 14 "19" at 17.769,-5.814 h0.6 r270; Mechanical 14 "20" at 16.769,-5.814 h0.6 r270; Mechanical 14 "21" at 15.769,-5.814 h0.6 r270; Mechanical 14 "22" at 14.819,-5.814 h0.6 r270; Mechanical 14 "17" at 19.769,-5.814 h0.6 r270; Mechanical 14 "AB" at 38.419,16.986 h0.6 r180; Mechanical 14 "AA" at 38.419,15.986 h0.6 r180; Mechanical 14 "Y" at 37.919,14.986 h0.6 r180; Mechanical 14 "W" at 37.919,13.986 h0.6 r180; Mechanical 14 "V" at 37.919,12.986 h0.6 r180; Mechanical 14 "U" at 37.919,11.986 h0.6 r180; Mechanical 14 "T" at 37.919,10.986 h0.6 r180; Mechanical 14 "R" at 37.919,9.986 h0.6 r180; Mechanical 14 "P" at 37.919,8.986 h0.6 r180; Mechanical 14 "N" at 37.919,7.986 h0.6 r180; Mechanical 14 "M" at 37.919,6.986 h0.6 r180; Mechanical 14 "L" at 37.919,5.986 h0.6 r180; Mechanical 14 "K" at 37.919,4.986 h0.6 r180; Mechanical 14 "J" at 37.919,3.986 h0.6 r180; Mechanical 14 "H" at 37.919,2.986 h0.6 r180; Mechanical 14 "G" at 37.919,1.986 h0.6 r180; Mechanical 14 "F" at 37.919,0.986 h0.6 r180; Mechanical 14 "E" at 37.919,-0.014 h0.6 r180; Mechanical 14 "D" at 37.919,-1.014 h0.6 r180; Mechanical 14 "C" at 37.919,-2.014 h0.6 r180; Mechanical 14 "B" at 37.919,-3.014 h0.6 r180; Mechanical 14 "A" at 37.919,-4.014 h0.6 r180; Mechanical 14 "AC" at 38.419,17.986 h0.6 r180; Mechanical 14 "AD" at 38.419,18.986 h0.6 r180; Mechanical 14 "AE" at 38.419,19.986 h0.6 r180; Mechanical 14 "AF" at 38.419,20.986 h0.6 r180
SW1A: Top Overlay "4" at 64.905,40.237 h1 r90; Top Overlay "3" at 64.905,38.967 h1 r90; Top Overlay "ON" at 61.349,36.046 h1 r90; Top Overlay "2" at 64.905,37.697 h1 r90; Top Overlay "1" at 64.905,36.427 h1 r90; Mechanical 14 "4" at 64.895,40.237 h1 r90; Mechanical 14 "3" at 64.895,38.967 h1 r90; Mechanical 14 "ON" at 61.339,36.046 h1 r90; Mechanical 14 "2" at 64.895,37.697 h1 r90; Mechanical 14 "1" at 64.895,36.427 h1 r90
SW1B: Top Overlay "4" at 64.83,4.373 h1 r90; Top Overlay "3" at 64.83,3.103 h1 r90; Top Overlay "ON" at 61.274,0.182 h1 r90; Top Overlay "2" at 64.83,1.833 h1 r90; Top Overlay "1" at 64.83,0.563 h1 r90; Mechanical 14 "4" at 64.82,4.373 h1 r90; Mechanical 14 "3" at 64.82,3.103 h1 r90; Mechanical 14 "ON" at 61.264,0.182 h1 r90; Mechanical 14 "2" at 64.82,1.833 h1 r90; Mechanical 14 "1" at 64.82,0.563 h1 r90
X1A: Top Overlay "1" at -82.619,49.369 h1.2
X1B: Top Overlay "1" at -82.784,19.431 h1.2
"X4 - nowyA": Top Overlay "1" at -38.412,55.482 h1.2
"X4 - nowyB": Top Overlay "1" at -38.412,25.482 h1.2
X7: Top Overlay "1" at 0.498,-2.372 h1.2 r90
X8: Top Overlay "1" at 135.135,-17.394 h0.97; Top Overlay "2" at 138.867,-17.387 h0.97; Mechanical 14 "1" at 135.135,-17.394 h0.97; Mechanical 14 "2" at 138.867,-17.387 h0.97
X15: Top Overlay "1" at 130.951,-29.647 h1 r270; Mechanical 14 "1" at 130.951,-29.647 h1 r270
X20A: Top Overlay "1" at -62.958,28.772 h1.2 r270
X20B: Top Overlay "1" at -65.498,28.772 h1.2 r270
X20C: Top Overlay "1" at -62.958,58.772 h1.2 r270
X20D: Top Overlay "1" at -65.498,58.772 h1.2 r270
X21A: Top Overlay "1" at -17.968,30.278 h1.2 r180
X21B: Top Overlay "1" at -17.968,0.278 h1.2 r180